# Altium PCB STM32.PcbDoc
Units mm, origin at the board's own origin, x right, y up, seen from the top; angles counter-clockwise.
Board outline 39 x 31 mm, 4 copper layers (Top Layer, Int1 (GND), Int2 (GND), Int 3 (SGNL)), stack 1.57 mm thick; 35 components, 29 nets, 174 pads, 58 vias.
Unrouted connection lines stored in the file: 4.
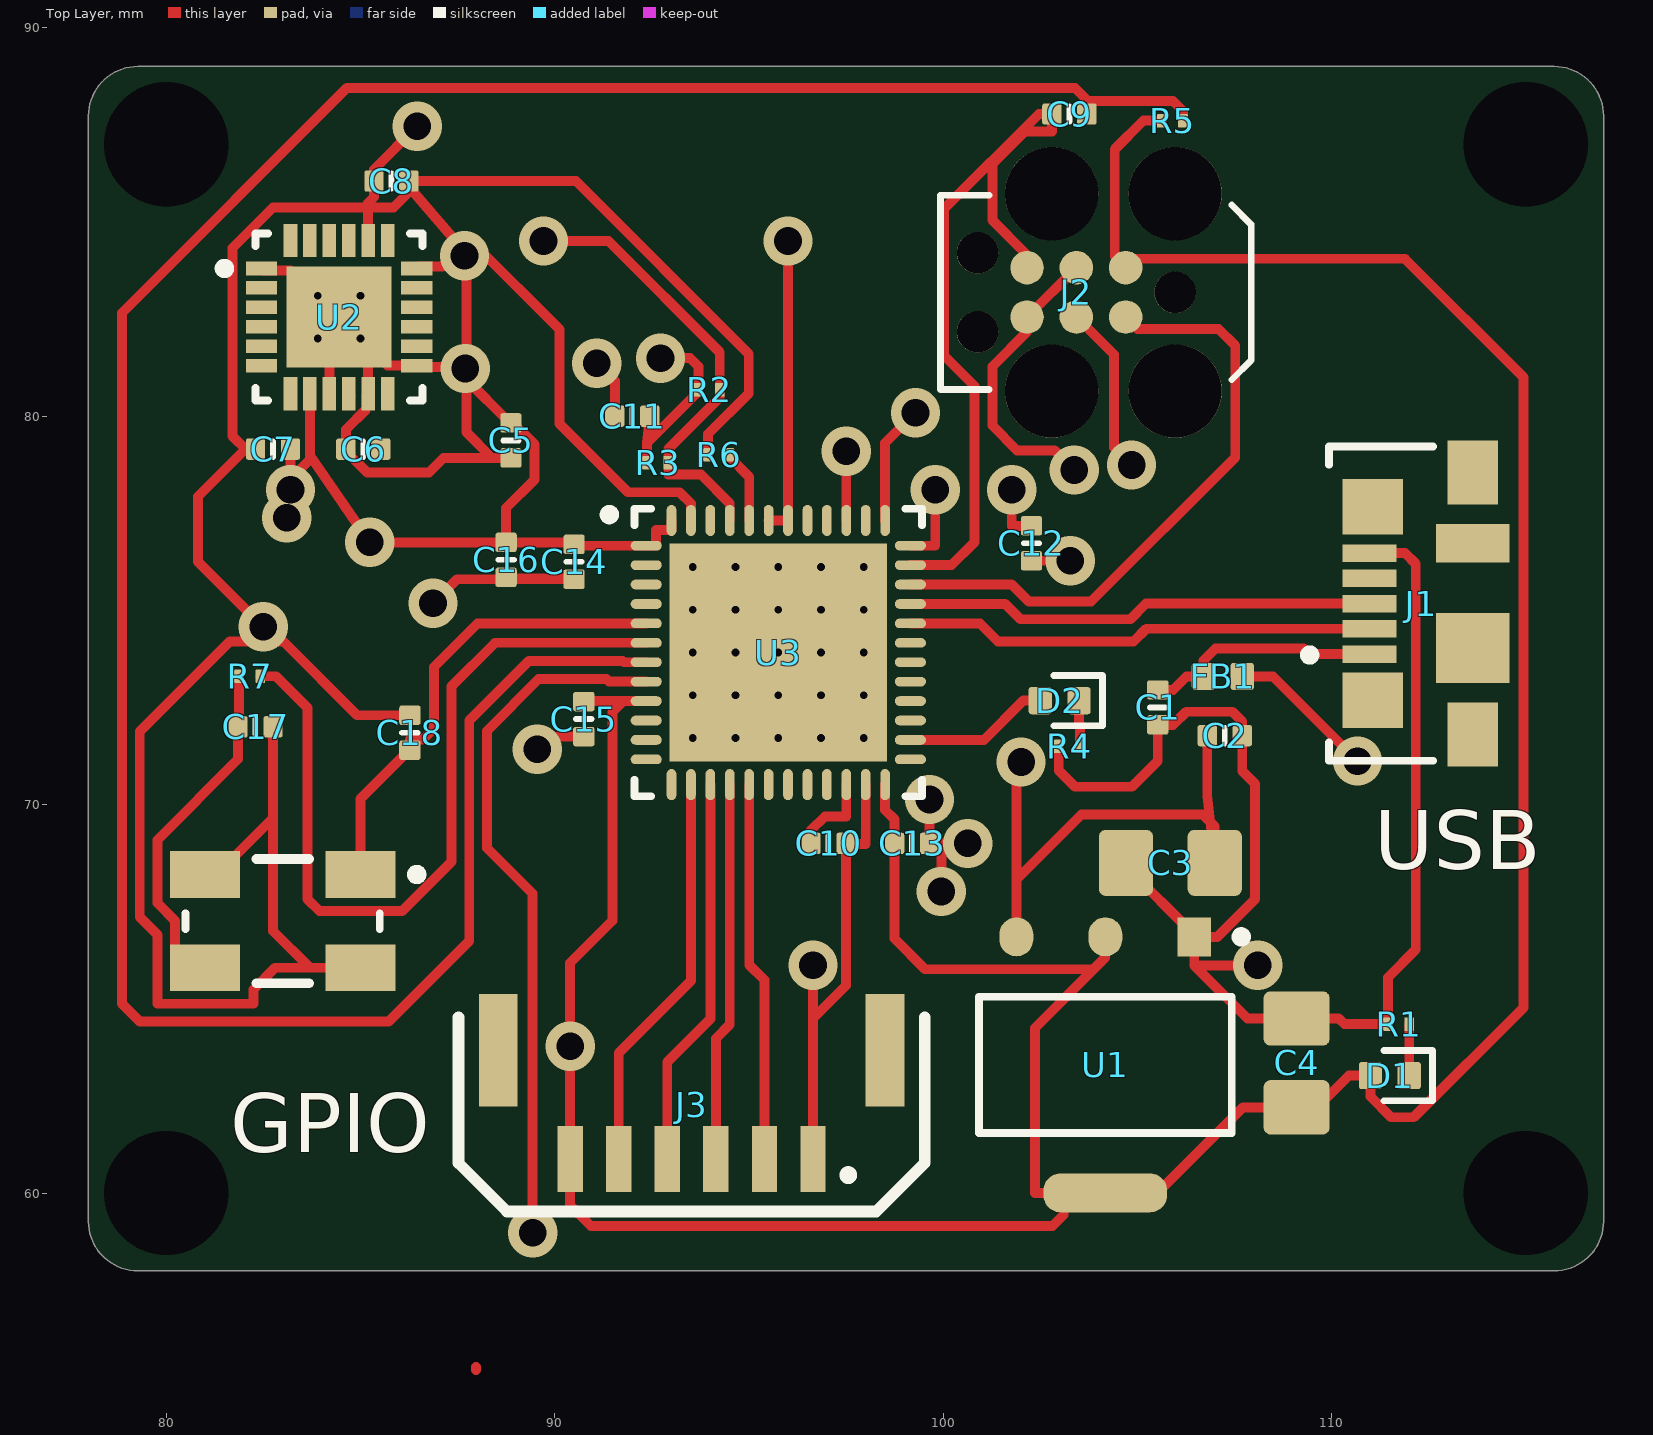
[diagram p0: Top Layer view]
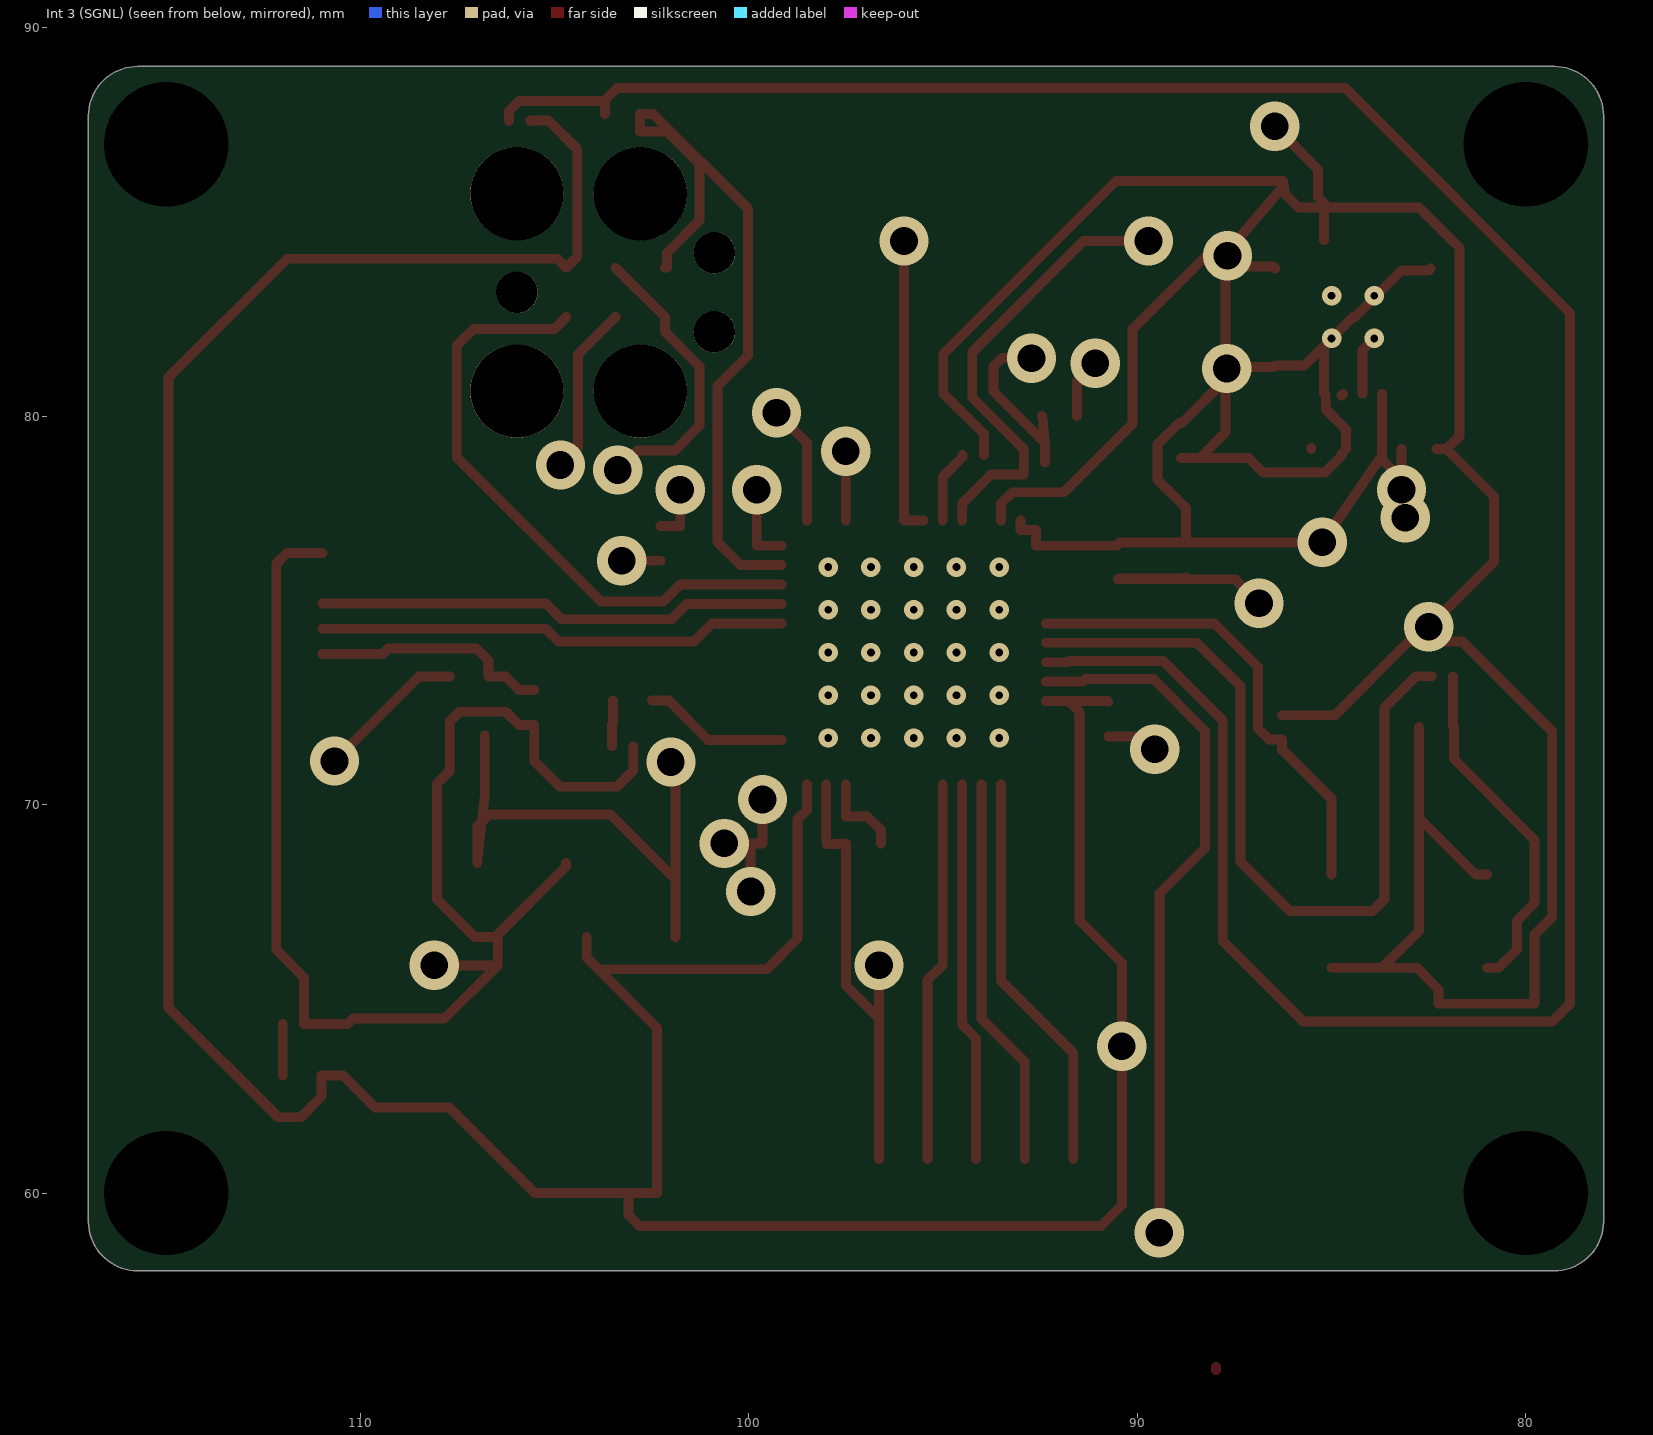
[diagram p1: Int 3 (SGNL) view, seen from below]
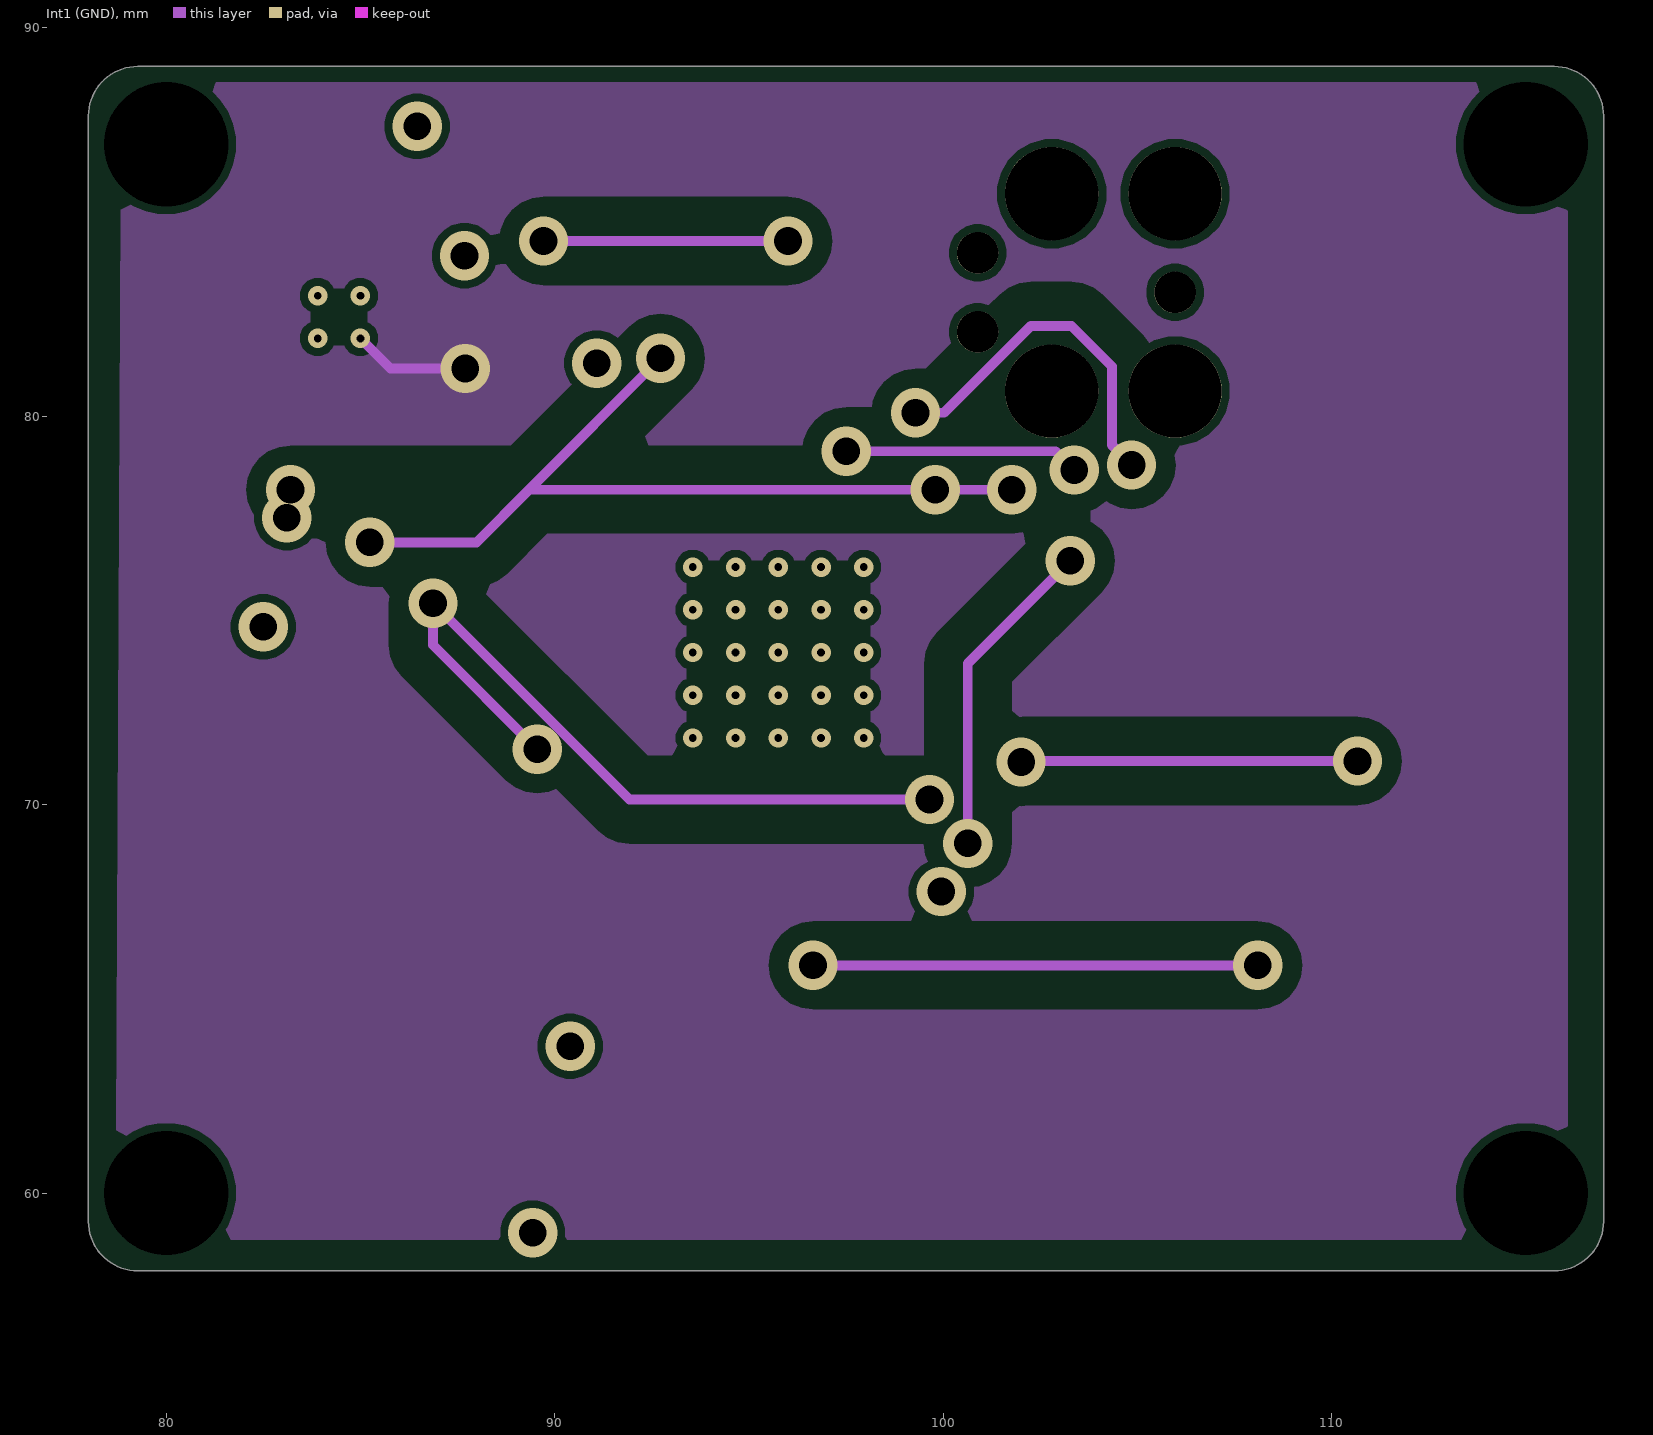
[diagram p2: Int1 (GND)]
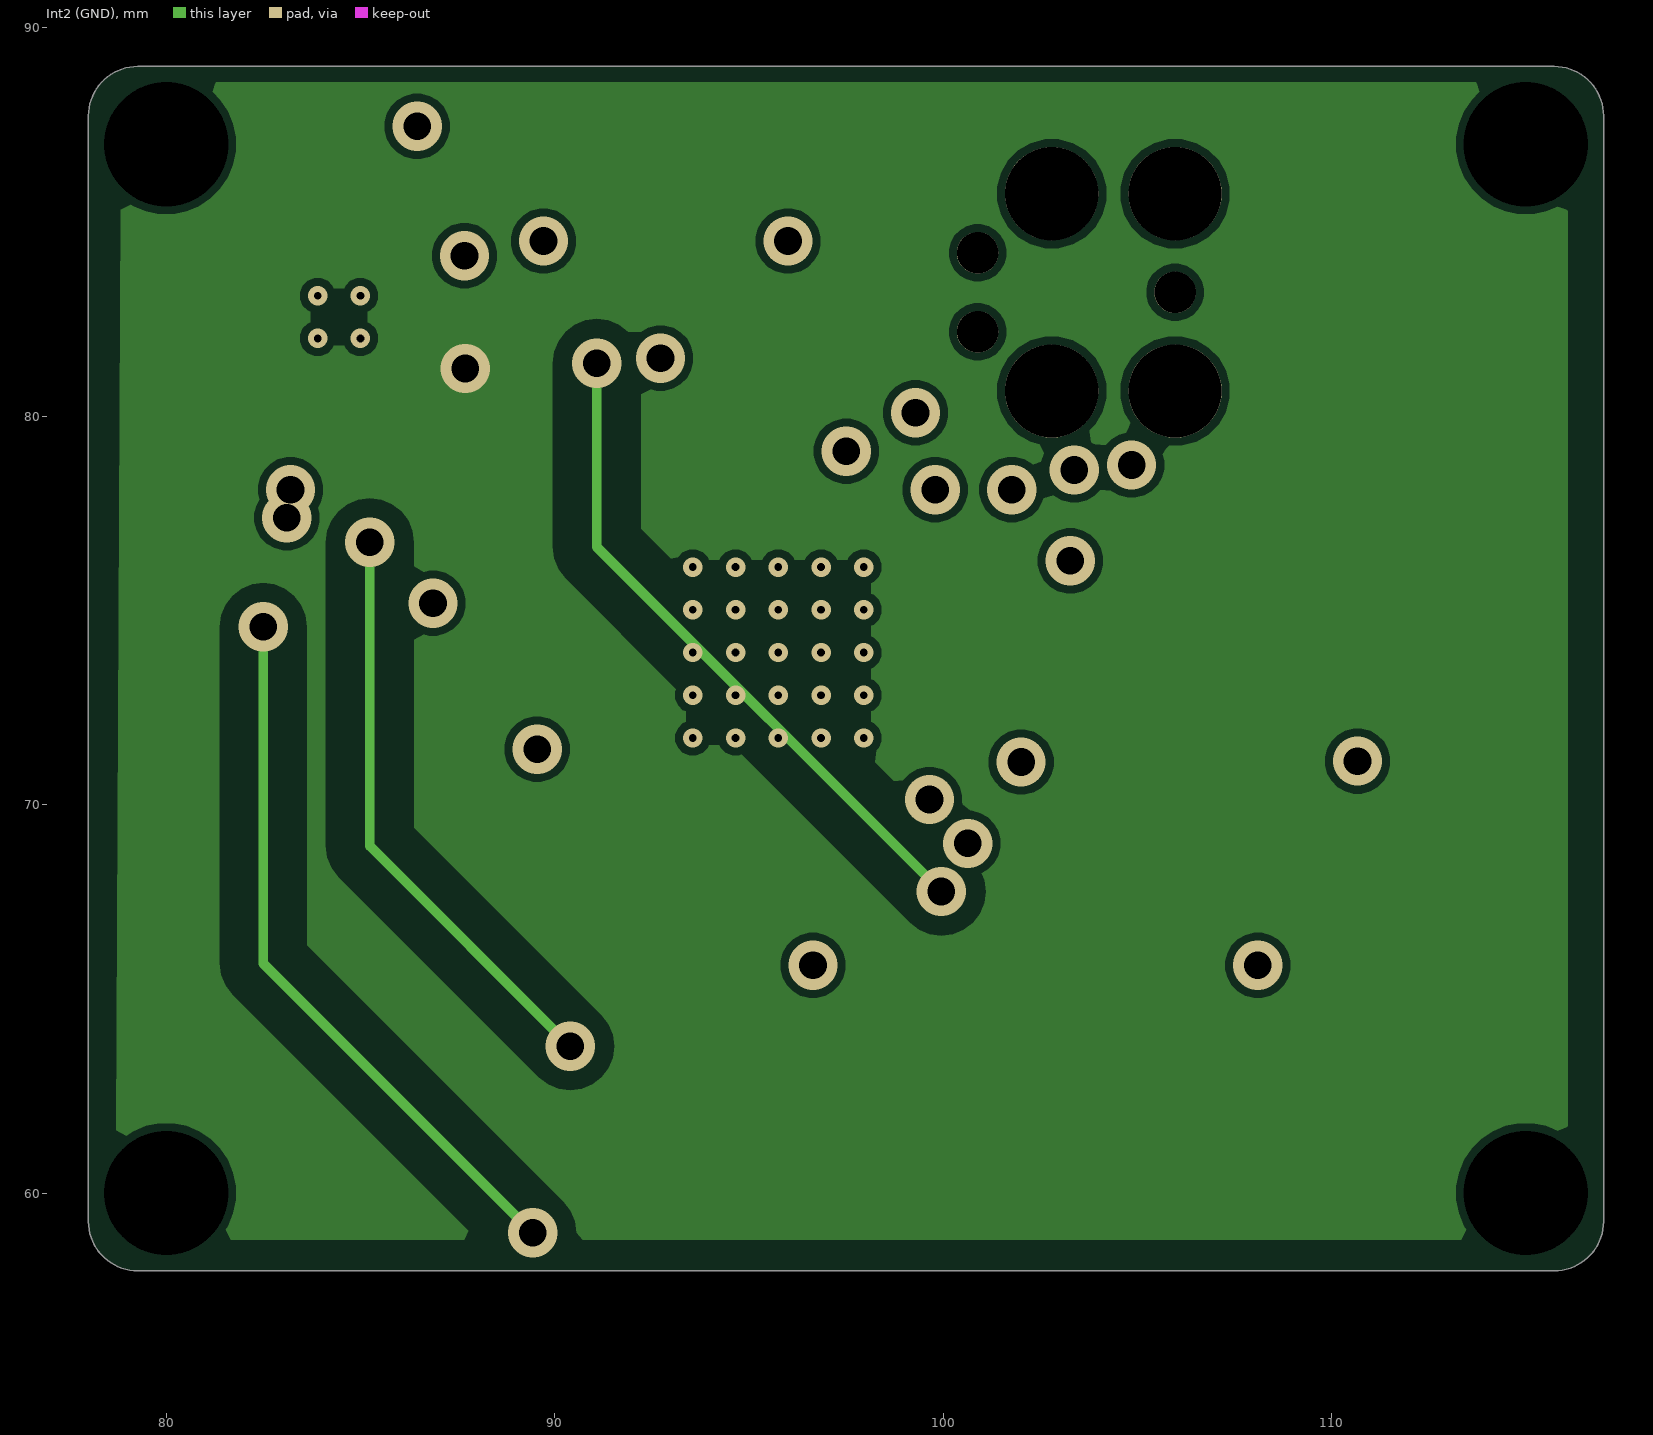
[diagram p3: Int2 (GND)]
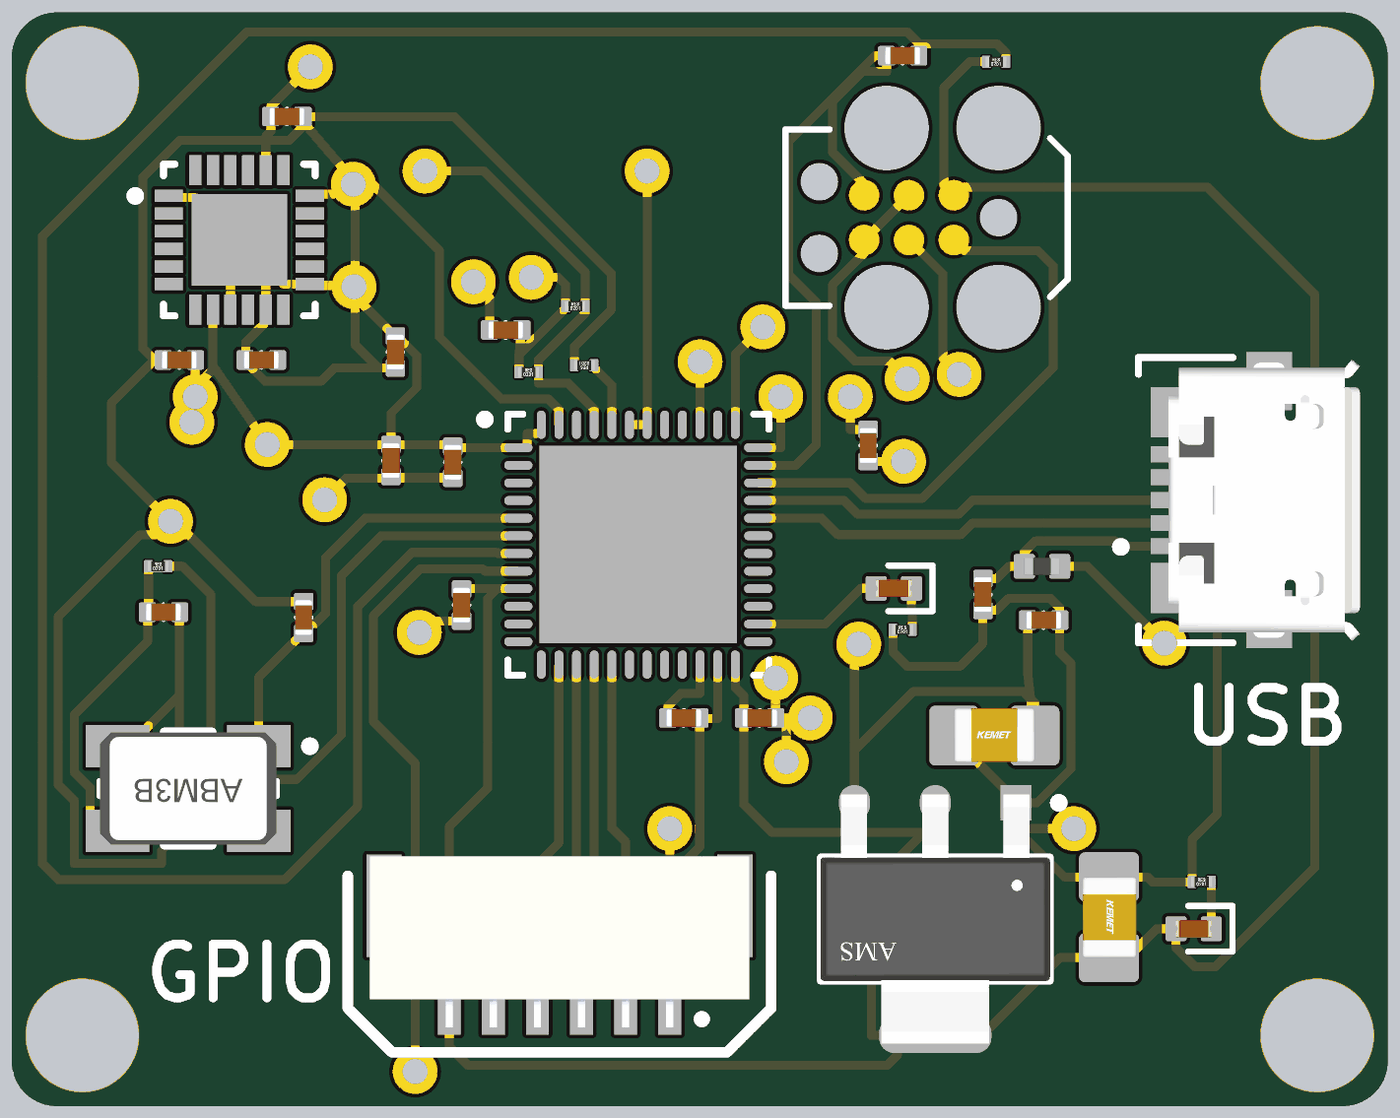
[diagram p4: 3D render of the assembled board from above, using the file's embedded part models]

## Layer stack, top to bottom
Top Solder: solder mask 0.0254, SM-001, Dk 4
Top Layer: signal copper 0.035
Dielectric 1: prepreg 0.2, PP-017, Dk 4.6
Int1 (GND): signal copper 0.0175
Dielectric 3: core 1.065, Core-039, Dk 4.6
Int2 (GND): signal copper 0.0175
Dielectric 5: prepreg 0.2, PP-017, Dk 4.6
Int 3 (SGNL): signal copper 0.035
Bottom Solder: solder mask 0.0254, SM-001, Dk 4

## Board outline
78,59.27 78,87.73 cw(c79.27,87.73) 79.27,89 115.73,89 cw(c115.73,87.73) 117,87.73 117,59.27 cw(c115.73,59.27) 115.73,58 79.27,58 cw(c79.27,59.27)

## Design rules (kind name [scope] priority, off if disabled: settings)
AssemblyTestPointUsage [All] p1: isadvanced=TRUE
AssemblyTestpoint [All] p1: isadvanced=TRUE testpointundercomponent=TRUE minsize=1.016 maxsize=2.54 preferedsize=1.524 minholesize=0 maxholesize=1.016 preferedholesize=0.813 testpointgrid=0.025 usegrid=TRUE gridtolerance=0 allowsidetop=TRUE allowsidebottom=TRUE
Clearance Clearance_1 [InNamedPolygon('NONET_L02_P000')] p1: isadvanced=TRUE gap=0.254 ignorepadtopadclearanceinfootprint=FALSE
Clearance Clearance_1 [(ExistsOnLayer('Int1 (GND)') Or ExistsOnLayer('Int2 (GND)')) vs (ExistsOnLayer('Int1 (GND)') Or ExistsOnLayer('Int2 (GND)'))] p2: gap=1 ignorepadtopadclearanceinfootprint=FALSE except(0.2: SMDPad-SMDPad SMDPad-THPad SMDPad-Via SMDPad-Fill SMDPad-Poly SMDPad-Region SMDPad-Hole Via-Via Via-Fill Via-Poly Via-Region Via-Hole Fill-Fill Fill-Poly Fill-Region Fill-Hole Poly-Poly Poly-Region Poly-Hole Region-Region Region-Hole Hole-Hole) sourcerule=37 cellrowname=All cellrowtype=0 cellcolname=All cellcoltype=0 innerlayers=TRUE
Clearance Clearance_2 [(ExistsOnLayer('Top Layer') Or ExistsOnLayer('Int 3 (SGNL)')) vs (ExistsOnLayer('Top Layer') Or ExistsOnLayer('Int 3 (SGNL)'))] p3: gap=1 ignorepadtopadclearanceinfootprint=FALSE except(0.2: SMDPad-SMDPad SMDPad-THPad SMDPad-Via SMDPad-Fill SMDPad-Poly SMDPad-Region SMDPad-Hole Via-Via Via-Fill Via-Poly Via-Region Via-Hole Fill-Fill Fill-Poly Fill-Region Fill-Hole Poly-Poly Poly-Region Poly-Hole Region-Region Region-Hole Hole-Hole) sourcerule=37 cellrowname=All cellrowtype=0 cellcolname=All cellcoltype=0 outerlayers=TRUE
Clearance [All] p4: gap=0.2 ignorepadtopadclearanceinfootprint=FALSE ismatrix=TRUE
ComponentClearance [All] p1: isadvanced=TRUE gap=0.254 collisioncheckmode=3 verticalgap=0.254 showdistances=FALSE
FabricationTestPointUsage [All] p1: isadvanced=TRUE valid=0 allowmultiple=FALSE
FabricationTestpoint [All] p1: isadvanced=TRUE side=3 testpointundercomponent=TRUE minsize=1.016 maxsize=2.54 preferedsize=1.524 minholesize=0 maxholesize=1.016 preferedholesize=0.813 testpointgrid=0.025 allowsidetop=TRUE allowsidebottom=TRUE usegrid=TRUE gridtolerance=0
FanoutControl Fanout_BGA [IsBGA] p1: isadvanced=TRUE bgadir=Out bgaviamode=Centered fanoutstyle=Auto fanoutdirection=Alternating viagrid=0.025 // Fanout_BGA (Default Rule)
FanoutControl Fanout_LCC [IsLCC] p2: isadvanced=TRUE bgadir=Out bgaviamode=Centered fanoutstyle=Auto fanoutdirection=Alternating viagrid=0.025 // Fanout_LCC (Default Rule)
FanoutControl Fanout_SOIC [IsSOIC] p3: isadvanced=TRUE bgadir=Out bgaviamode=Centered fanoutstyle=Auto fanoutdirection=Alternating viagrid=0.025 // Fanout_SOIC (Default Rule)
FanoutControl Fanout_Small [(CompPinCount < 5)] p4: isadvanced=TRUE bgadir=Out bgaviamode=Centered fanoutstyle=Auto fanoutdirection=OutThenIn viagrid=0.025 // Fanout_Small (Default Rule)
FanoutControl Fanout_Default [All] p5: isadvanced=TRUE bgadir=Out bgaviamode=Centered fanoutstyle=Auto fanoutdirection=Alternating viagrid=0.025 // Fanout_Default (Default Rule)
Height [All] p1: isadvanced=TRUE minheight=0 maxheight=25.4 prefheight=12.7
HoleSize [All] p1: isadvanced=TRUE absolutevalues=TRUE maxlimit=2.54 minlimit=0.025 maxpercent=80.000 minpercent=20.000
HoleToHoleClearance [All] p1: isadvanced=TRUE gap=0.254 allowstackedmicrovias=TRUE
LayerPairs [All] p1: isadvanced=TRUE enforce=TRUE
MinimumSolderMaskSliver [All] p1: isadvanced=TRUE minsoldermaskwidth=0.254
NetAntennae [All] p1: isadvanced=TRUE netantennaetolerance=0
PasteMaskExpansion [All] p1: isadvanced=TRUE expansion=0
PlaneClearance [All] p1: isadvanced=TRUE clearance=0.508
PlaneConnect [All] p1: isadvanced=TRUE planeconnectstyle=Relief reliefexpansion=0.508 reliefentries=4 reliefconductorwidth=0.254 reliefairgap=0.254
PolygonConnect [All] p1: connectstyle=Relief reliefconductorwidth=0.254 reliefentries=4 polygonreliefangle="90 Angle" airgapwidth=0.254
RoutingCorners [All] p1: isadvanced=TRUE cornerstyle=45-Degree minsetback=2.54 maxsetback=2.54
RoutingPriority [All] p1: isadvanced=TRUE routingpriority=0
RoutingVias [All] p1: holewidth=0.711 width=1.27 viastyle="Through Hole" minholewidth=0.711 minwidth=1.27 maxholewidth=0.711 maxwidth=1.27
ShortCircuit [All] p1: isadvanced=TRUE allowed=FALSE
SilkToSilkClearance [All] p1: isadvanced=TRUE silktosilkclearance=0.254
SilkToSolderMaskClearance [IsPad] p1: isadvanced=TRUE minsilkscreentomaskgap=0.254 clearancetoexposedcopper=TRUE
SolderMaskExpansion [All] p1: isadvanced=TRUE expansion=0.102 istentingtop=FALSE
UnRoutedNet [All] p1: isadvanced=TRUE checkbadconnections=TRUE
UnpouredPolygon [All] p1: isadvanced=TRUE
Width [All] p1: maxlimit=0.254 minlimit=0.254 preferedwidth=0.254
4 further rules are at their usual default settings.

## Classes and differential pairs
component class STM32: C1 C2 C3 C4 C5 C6 C7 C8 C9 C10 C11 C12 C13 C14 C15 C16 C17 C18 D1 D2 FB1 J1 J2 R1 R2 R3 R4 R5 R6 R7 U1 U2 U3

## Components (designator, comment, footprint, x,y, rotation, side; value= is the part's Value field where it differs from the comment)
C1 "Capacitor 100nF +/-20% 50V 0402" CAPC0402(1005)60_L 105.525,72.5 r90 top value=2.2uF
C2 "Capacitor 100nF +/-20% 50V 0402" CAPC0402(1005)60_L 107.25,71.775 r180 top value=2.2uF
C3 "22uF" CAP_0805 105.85,68.5 r0 top
C4 "22uF" CAP_0805 109.1,63.35 r270 top
C5 "Capacitor 100nF +/-20% 50V 0402" CAPC0402(1005)60_L 88.875,79.375 r90 top value=100nF
C6 "Capacitor 100nF +/-20% 50V 0402" CAPC0402(1005)60_L 85.075,79.15 r0 top value=100nF
C7 "Capacitor 100nF +/-20% 50V 0402" CAPC0402(1005)60_L 82.75,79.15 r0 top value=10nF
C8 "Capacitor 100nF +/-20% 50V 0402" CAPC0402(1005)60_L 85.8,86.05 r180 top value=2.2nF
C9 "Capacitor 100nF +/-20% 50V 0402" CAPC0402(1005)60_L 103.25,87.775 r0 top value=100nF
C10 "Capacitor 100nF +/-20% 50V 0402" CAPC0402(1005)60_L 97.05,69 r180 top value=2.2uF
C11 "Capacitor 100nF +/-20% 50V 0402" CAPC0402(1005)60_L 92,80 r0 top value=100nF
C12 "Capacitor 100nF +/-20% 50V 0402" CAPC0402(1005)60_L 102.275,76.725 r90 top value=100nF
C13 "Capacitor 100nF +/-20% 50V 0402" CAPC0402(1005)60_L 99.2,69 r180 top value=100nF
C14 "Capacitor 100nF +/-20% 50V 0402" CAPC0402(1005)60_L 90.5,76.25 r90 top value=100nF
C15 "Capacitor 100nF +/-20% 50V 0402" CAPC0402(1005)60_L 90.75,72.2 r90 top value=100nF
C16 "Capacitor 100nF +/-20% 50V 0402" CAPC0402(1005)60_L 88.75,76.3 r90 top value=2.2uF
C17 "Capacitor 100nF +/-20% 50V 0402" CAPC0402(1005)60_L 82.3,72 r180 top value=10pF
C18 "Capacitor 100nF +/-20% 50V 0402" CAPC0402(1005)60_L 86.275,71.85 r270 top value=10pF
D1 "RED" LED_0402_RED 111.5,63.025 r0 top
D2 "RED" LED_0402_RED 103,72.675 r0 top
FB1 "120R" FB_0402 107.2,73.3 r0 top
J1 "473460001" FP-473460001-MFG 113.285,75.175 r90 top
J2 "TC2030" TC2030-FP 103.43,83.185 r180 top
J3 "SM06B-GHS-TB" SM06B-GHS-TB 93.525,62.275 r180 top
R1 "1K" RES_0201 111.725,64.35 r0 top
R2 "2.2K" RES_0201 93.975,80.675 r0 top
R3 "2.2K" RES_0201 92.65,78.8 r0 top
R4 "1K" RES_0201 103.25,71.5 r0 top
R5 "10K" RES_0201 105.9,87.6 r0 top
R6 "10K" RES_0201 94.225,79 r180 top
R7 "0K" RES_0201 82.15,73.3 r0 top
U1 "AMS1117-3.3" FP-AMS1117-IPC_C 104.175,63.3 r270 top
U2 "MPU-6050" IS-QFN-24_V 84.45,82.55 r0 top
U3 "STM32F411CEU6" STM-UFQFPN48_L 95.758,73.914 r0 top
? "24MHz" ABRA-ABM3B-4_V 83,67 r180 top

## Footprints (in the part's own frame and the unit in brackets; to place one, negate y for a bottom-side part, rotate by r counter-clockwise, add the part's x,y. Pads: shape width x height; smd on the part's side, far side on the other; paste and mask are expansions set on the pad)
ABRA-ABM3B-4_V [mm] "SMD, 4-Leads, Body 5x3.2mm"
  rect 1.8x1.2 smd: 1(-2,-1.2) 2(2,-1.2) 3(2,1.2) 4(-2,1.2)
  silkscreen extent -3.58,-1.6 2.5,1.6, body extent -2.5,-1.59 2.5,1.59, height 1.13
CAP_0805 [mm]
  rrect25% 1.4x1.7 smd: 1(-1.143,0) 2(1.143,0)
  body extent -1.15,-0.76 1.15,0.79, height 1.01
CAPC0402(1005)60_L [mm] "Chip Capacitor, Body 1.0x0.5mm, Height 0.6mm, IPC High Density"
  rrect25% 0.5x0.55 smd: 1(-0.45,0) 2(0.45,0)
  silkscreen extent 0,-0.2 0,0.2, body extent -0.5,-0.25 0.5,0.25, height 0.6
FB_0402 [mm]
  rrect25% 0.6x0.7 smd: 1(-0.5,0) 2(0.5,0)
  body extent -0.5,-0.25 0.5,0.25, height 0.51
FP-473460001-MFG [mm]
  rect 0.45x1.38 smd paste+0 mask+0: 1(-1.3,2.31) 2(-0.65,2.31) 3(0,2.31) 4(0.65,2.31) 5(1.3,2.31)
  rect 1.425x1.55 smd paste+0 mask+0: 6(-2.488,2.225) 7(2.487,2.225)
  rect 1.65x1.3 smd paste+0 mask+0: 8(-3.375,-0.35) 11(3.375,-0.35)
  rect 1.8x1.9 smd paste+0 mask+0: 9(-1.15,-0.35)
  rect 1x1.9 smd paste+0 mask+0: 10(1.55,-0.35)
  silkscreen extent -4.04,0.68 4.05,3.97, body extent -4.3,-2.48 4.3,3.45, height 0.25
FP-AMS1117-IPC_C [mm]
  rect 1.004x0.872 smd paste+0 mask+0: 1(-3.295,2.29)
  rrect100% 1.004x0.872 smd paste+0 mask+0: 2(-3.295,0) 3(-3.295,-2.29)
  rrect87% 1.004x3.182 smd paste+0 mask+0: 4(3.295,0)
  silkscreen extent -3.42,-3.25 1.75,3.63, body extent -3.9,-3.35 3.9,3.35, height 0.25
IS-QFN-24_V [mm] "QFN, 24-Leads, Body 4x4mm, Pitch 0.5mm, Thermal Pad 2.7x2.6mm"
  rect 0.8x0.35 smd: 1(-2,1.25) 2(-2,0.75) 3(-2,0.25) 4(-2,-0.25) 5(-2,-0.75) 6(-2,-1.25) 13(2,-1.25) 14(2,-0.75) 15(2,-0.25) 16(2,0.25) 17(2,0.75) 18(2,1.25)
  rect 0.35x0.85 smd mask+0.102: 7(-1.25,-1.975) 8(-0.75,-1.975) 9(-0.25,-1.975) 10(0.25,-1.975) 11(0.75,-1.975) 12(1.25,-1.975) 19(1.25,1.975) 20(0.75,1.975) 21(0.25,1.975) 22(-0.25,1.975) 23(-0.75,1.975) 24(-1.25,1.975)
  rect 2.7x2.6 smd: 25(0,0)
  silkscreen extent -3.07,-2.15 2.15,2.15, body extent -2,-2 2,2, height 0.95
LED_0402_RED [mm]
  rrect25% 0.6x0.7 smd: A(-0.5,0) K(0.5,0)
  silkscreen extent -0.15,-0.65 1.1,0.65, body extent -0.51,-0.25 0.51,0.25, height 0.45
RES_0201 [mm]
  rrect25% 0.25x0.35 smd mask+0.05: 1(-0.275,0) 2(0.275,0)
  body extent -0.3,-0.15 0.3,0.15, height 0.15
SM06B-GHS-TB [mm]
  rect 0.65x1.7 smd: 1(-3.125,1.4) 2(-1.875,1.4) 3(-0.625,1.4) 4(0.625,1.4) 5(1.875,1.4) 6(3.125,1.4)
  rect 1x2.9 smd: ""(-4.975,-1.4) ""(4.975,-1.4)
  silkscreen extent -6,-2.25 6,2.75, body extent -5.38,-2.8 5.38,2.05, height 4.26
STM-UFQFPN48_L [mm] "QFN, 48-Leads, Body 7.1x7.1mm, Pitch 0.5mm, Thermal Pad 5.6x5.6mm, IPC High Density"
  oval 0.8x0.25 smd: 1(-3.4,2.75) 2(-3.4,2.25) 3(-3.4,1.75) 4(-3.4,1.25) 5(-3.4,0.75) 6(-3.4,0.25) 7(-3.4,-0.25) 8(-3.4,-0.75) 9(-3.4,-1.25) 10(-3.4,-1.75) 11(-3.4,-2.25) 12(-3.4,-2.75) 25(3.4,-2.75) 26(3.4,-2.25) 27(3.4,-1.75) 28(3.4,-1.25) 29(3.4,-0.75) 30(3.4,-0.25) 31(3.4,0.25) 32(3.4,0.75) 33(3.4,1.25) 34(3.4,1.75) 35(3.4,2.25) 36(3.4,2.75)
  oval 0.25x0.8 smd: 13(-2.75,-3.4) 14(-2.25,-3.4) 15(-1.75,-3.4) 16(-1.25,-3.4) 17(-0.75,-3.4) 18(-0.25,-3.4) 19(0.25,-3.4) 20(0.75,-3.4) 21(1.25,-3.4) 22(1.75,-3.4) 23(2.25,-3.4) 24(2.75,-3.4) 37(2.75,3.4) 38(2.25,3.4) 39(1.75,3.4) 40(1.25,3.4) 41(0.75,3.4) 42(0.25,3.4) 43(-0.25,3.4) 44(-0.75,3.4) 45(-1.25,3.4) 46(-1.75,3.4) 47(-2.25,3.4) 48(-2.75,3.4)
  rect 5.6x5.6 smd: 49(0,0)
  silkscreen extent -4.47,-3.7 3.7,3.7, body extent -3.55,-3.55 3.55,3.55, height 0.6
TC2030-FP [mil]
  round 33.98 smd paste-17.01: 1(-50,-25) 2(-50,25) 3(0,-25) 4(0,25) 5(50,-25) 6(50,25)
  round 94.49 hole 94.49 unplated: MH(-100,100) MH(-100,-100) MH(25,100) MH(25,-100)
  round 42.01 hole 42.01 unplated: MH(-100,0) MH(100,-40) MH(100,40)
  silkscreen extent -177,-98 138,98

## Part data
C1 C2 C5 C6 C7 C8 C9 C10 C11 C12 C13 C14 C15 C16 C17 C18: library part CMP-001-00067-3, "Chip Capacitor, 100nF +/-20%, 50V, 0402, Thickness 0.6 mm", Case/Package=0402, Max Operating Temperature=85°C, Min Operating Temperature=-55°C, Tolerance=10%, Voltage Rating=50V, Mounting Technology=SMT, Pins=2
C3 C4: library part CAP_0805, "Capacitor SMD 0805"
D1 D2: library part LED_0402_RED, "LED 0402 RED SMD"
FB1: library part FB_0402, "Ferrite Bead SMD 0402"
J1: library part CMP-2000-05246-2, "CONN RCPT USB2.0 MICRO B SMD R/A", Current Rating=1.8A, Manufacturer=Molex, Package=0, Temperature="-30°C to +85°C", Temperature Range High=+85°C, Temperature Range Low=-30°C, Voltage Rating=30V, Automotive=No, Category=Conn, ComponentLink2Description=Datasheet, ComponentLink2URL=https://www.molex.com/webdocs/datasheets/pdf/en-us/0473460001_IO_CONNECTORS.pdf, Conn Orientation="Right Angle", Contact Material=Gold,Nickel, Device Class L1=Connectors, Device Class L2="USB Connectors", Device Class L3=unset, Digikey Description="CONN RCPT USB2.0 MICRO B SMD R/A", Footprint Url=https://www.molex.com/pdm_docs/sd/473460001_sd.pdf, Height=2.945mm, Is Female=yes, Lead Free=Yes, Manufacturer Part Number=473460001, Number Of Contacts=5, Octopart=https://octopart.com/47346-0001-molex-7164928, Pitch=0.65mm, RoHS=TRUE, Shielding=true, Usb Standard="USB 2.0"
J2: "Tag-Connect No-Solder SWD Debug Connector DO NOT PLACE", Manufacturer=Tag-Connect, Manufacturer Part Number=TC2030
J3: "Header Connector 6 Position 1.25MM Pitch SMD Horizontal JST GH", Manufacturer=JST, Manufacturer Part Number=SM06B-GHS-TB
R1 R2 R3 R4 R5 R6 R7: library part RES_0201, "Resistor SMD 0201"
U1: library part CMP-209535-000001-1, "LDO Voltage Regulators 1A, 3.3V", Dropout Voltage=1.1V, Manufacturer="Advanced Monolithic Systems", Max Junction Temp=+125°C, Max Power Dissipation=1.2W, Max Supply Voltage=15V, Nominal Supply Current=5mA, Output Current=1A, Output Voltage=3.3V, Package=AMS1117, Temperature="-40°C to +125°C", Temperature Range Low=-40°C, Automotive=No, Category=IC, ComponentLink2Description=Datasheet, ComponentLink2URL=http://www.advanced-monolithic.com/pdf/ds1117.pdf, Device Class L1="Integrated Circuits (ICs)", Device Class L2="Power Management ICs", Device Class L3="Voltage Regulators - Linear", Height=1.8mm, Ipc Land Pattern Name=SOT229P700X180-4, Lead Free=Yes, Manufacturer Part Number=AMS1117-3.3, Number Of Outputs=1, Octopart=https://octopart.com/ams1117-3.3-advanced+monolithic+systems-25899300, Output Type=Fixed, RoHS=TRUE, Standoff Height=0.64mm, Temperature Range High=+125°C
U2: library part CMP-1753-00002-2, "3-Axis Gyroscope, Accelerometer and a Digital Motion Processor(TM) (DMP), 2.375 to 3.46 V, -40 to 85 degC, 24-Pin QFN, RoHS, Tape and Reel", Manufacturer=InvenSense, Standard Package=5,000, Category=Sensors,Transducers, Datasheet URL=http://datasheet.octopart.com/MPU-6050-InvenSense-datasheet-14421344.pdf, Datasheet Version="Rev. 3.3, 05/2012", Dynamic Catalog=MPU-6000™Series, Family=Multifunction, Featured Product=MPU-60506-Axis,IntegratedI²CSolution, Manufacturer URL=http://www.invensense.com/, Online Catalog=MPU-6000™Series, Other Names="1428-1007-2 / MPU6050", Output Type=Digital, Sensor Type=MotionTracking, Unit PriceUSD=Digital
U3: library part CMP-0243-00165-1, "ARM Cortex-M4 32-bit MCU+FPU, 512 KB Flash, 128 KB RAM, 36 I/Os, 48-Pin UFQFPN, -40 to 85 degC, Tray", I/Os (High Current)=36, Operating Frequency(F) (Processor speed) (MHz)=100, Package Description=UFQFPN48, Package Reference="48-Pin Ultra Thin Fine Pitch Quad Flat No-Lead, 7 x 7 x 0.6 mm Body, 0.5 mm Pitch, Exposed Pad", Supply Voltage(Vcc) min (V)=1.7, ComponentLink1Description="Manufacturer URL", ComponentLink1URL=http://www.st.com/, ComponentLink2Description=Datasheet, ComponentLink2URL=http://www.st.com/st-web-ui/static/active/en/resource/technical/document/datasheet/DM00115249.pdf, Core="ARM Cortex-M4", DatasheetVersion="Rev. 6", FLASH Size (Prog) (kB)=512, Internal RAM Size (kB)=128, Mounting Technology="Surface Mount", Packing=Tray
?: library part CMP-003-00016-2, "Ceramic SMD Crystal, 12.288 MHz, +/- 20 ppm, 18 pF, -20 to 70 degC, 4-Pin SMD, RoHS, Tape and Reel", Case/Package=CSMD, Frequency=12.288MHz, Frequency Tolerance=20ppm, Load Capacitance=18pF, Manufacturer=Abracon, Max Operating Temperature=70°C, Min Operating Temperature=-20°C, Package Description="4-Pin Surface Mount Device, Body 5 x 3.2 mm", Package Quantity=1000, Package Reference=ABM3B, Resistance=70Ohm, Datasheet URL=http://www.abracon.com/Resonators/abm3b.pdf, Datasheet Version=Aug-15, ESR=70, Manufacturer URL=http://www.abracon.com/, Mounting Technology=SM, Packaging=TapeandReel, Pins=4, RoHS Compliant=True, Tolerance=20ppm

## Free pads (board coordinates)
  round 1 hole 3.2: MH(80,60) MH(80,87) MH(115,60) MH(115,87)

## Via types
v1: diameter 1.27, hole 0.711, Top Layer to Int 3 (SGNL), 29 vias
v2: diameter 0.5, hole 0.2, Top Layer to Int 3 (SGNL), 29 vias

## Nets (pads, with @x,y where several pads share a name; then routed paths per layer and width w, separated by ;. In a path a pad name is that pad's centre, name@x,y a point inside that pad or via, vN(x,y) a via of type N, cw(c..) or ccw(c..) an arc to the next point about the centre after c; other vN are vias at no path point)
+3V3: C4.2 C5.2 C7.2 C11.2 C12.2 C13.2 C14.2 C15.2 C16.2 D1.A J2.1 J3.6 R2.1 R3.1 R5.1 U1.2 U1.4 U2.8 U2.13 U3.1 U3.9 U3.24 U3.36 U3.48 | length 166.1
  Top Layer w0.254: v1(83.106,77.384) 83.2,77.478 v1(83.2,78.105) v1@83.2,78.38 ; C7.2 v1@83.2,78.38 ; U2.8 83.7,78.987 ; 85,82 85.7,81.3 U2.13 86.488,81.263 87.662,81.263 v1(87.7,81.225) 87.7,80.975 88.85,79.825 88.926,79.825 89.477,79.274 89.477,78.363 88.75,77.636 C16.2 ; C15.2 90.762,72.662 90.873,72.662 90.875,72.664 91.765,72.664 ; U3.9 91.765,72.664 ; R3.1 92.375,79.304 ; C11.2 92.375,79.304 ; v1(92.727,81.492) 93.488,81.492 93.7,81.28 R2.1 93.7,80.629 92.375,79.304 ; U3.48 93.008,77.064 92.608,77.064 92.608,76.664 U3.1 90.536,76.664 C14.2 90.45,76.75 C16.2 ; U3.24 98.508,69.863 98.75,69.621 C13.2 98.75,66.548 99.537,65.761 103.87,65.761 ; U3.36 99.797,76.664 v1(99.797,78.105) ; v1(101.767,78.105) 101.767,77.175 C12.2 ; U1.2 104.175,66.065 103.87,65.761 ; R5.1 105.625,87.605 105.156,87.605 104.419,86.868 104.419,84.101 J2.1 104.929,84.049 111.887,84.049 114.935,81.001 114.935,64.77 112.116,61.951 111.533,61.951 111,62.484 D1.A 110.444,63.025 109.626,62.207 C4.2 107.714,62.207 105.512,60.005 U1.4 U1.4@103.099,60.005 ; v1@83.2,78.38 83.7,78.88 83.7,78.987 ; 83.7,78.987 v1(85.242,76.75) C16.2 ; 91.765,72.664 91.491,72.39 91.491,67.011 90.4,65.92 v1(90.4,63.779) J3.6 90.4,59.689 90.932,59.157 102.819,59.157 103.099,59.436 U1.4@103.099,60.005 ; U1.4@103.099,60.005 102.362,60.005 102.362,64.252 103.87,65.761
  Int1 (GND) w0.254: 85,82 85.775,81.225 v1(87.7,81.225) ; v1(85.242,76.75) 87.984,76.75 89.339,78.105 ; v1(92.727,81.492) 89.339,78.105 ; v1(101.767,78.105) v1(99.797,78.105) 89.339,78.105
  Int2 (GND) w0.254: v1(85.242,76.75) 85.242,68.937 v1(90.4,63.779)
+5: C2.2 C3.2 FB1.2 U1.3 | length 27.2
  Top Layer w0.254: U1.3 101.885,68.072 ; v1(102.006,71.095) 101.885,70.973 101.885,68.072 ; C2.2 106.8,70.221 106.875,69.554 ; FB1.2 108.488,73.3 v1(110.668,71.12) ; 101.885,68.072 103.561,69.748 106.68,69.748 106.875,69.554 ; 106.875,69.554 C3.2 106.993,69.435 106.875,69.554
  Int1 (GND) w0.254: v1(102.006,71.095) 102.032,71.12 v1(110.668,71.12)
"CRY IN": ?.3 C17.2 R7.1 | length 9.1
  Top Layer w0.254: ?.3 80.7,65.8 80.227,66.273 80.227,67.011 79.773,67.465 79.773,69.092 81.85,71.169 C17.2 81.875,72.025 R7.1
GND: ?.2 ?.4 C1.1 C2.1 C3.1 C4.1 C5.1 C6.1 C7.1 C8.1 C9.1 C10.1 C17.1 C18.1 J1.5 J2.5 J3.1 R1.1 R4.1 R6.2 U1.1 U2.1 U2.9 U2.11 U2.18 U2.25 U3.8 U3.23 U3.35 U3.47 U3.49 | length 210.6
  Top Layer w0.254: ?.2 81.3,68.2 82.75,69.65 ; C7.1 82.042,79.15 ; U2.1 82.498,83.752 83.198,83.752 84.4,82.55 U2.25 v2(85,82) U2.25@85.2,81.8 ; v1(82.499,74.574) 80.823,76.251 80.823,77.931 82.042,79.15 ; C17.1 82.75,69.65 ; v2(83.9,82) 84.2,81.7 U2.9 ; ?.4 83.7,65.8 ; U2.25@85.623,81.377 U2.25@85.2,81.8 ; C8.1@86.25,85.909 87.732,84.184 87.732,79.585 88.392,78.925 ; C18.1 84.912,72.3 83.019,74.193 81.636,74.193 79.319,71.877 79.319,67.104 79.773,66.65 79.773,64.873 82.245,64.873 82.245,65.241 82.804,65.8 83.7,65.8 ; U2.18 86.498,83.848 v1@87.121,83.848 ; v1@87.954,84.406 90.122,82.237 90.122,79.804 91.885,78.041 93.218,78.041 93.508,77.751 U3.47 ; C5.1 88.392,78.925 ; v1(89.433,58.979) 89.433,67.707 88.255,68.885 88.255,71.898 89.586,73.228 91.338,73.228 91.403,73.164 U3.8 ; R6.2 93.95,79.539 94.996,80.585 94.996,81.601 90.547,86.05 C8.1 86.199,85.716 85.852,85.369 82.753,85.369 81.712,84.328 81.712,79.48 82.042,79.15 ; J3.1 96.65,64.491 ; v1(96.65,65.862) 96.65,64.491 ; C10.1 C10.1@97.5,68.986 ; U3.23 98.008,68.986 C10.1@97.5,68.986 ; U3.35 100.218,76.164 100.805,76.751 100.805,80.776 100.025,81.556 100.025,85.337 102.464,87.775 C9.1 102.8,87.325 102.108,87.325 101.268,86.485 101.268,85.04 102.11,84.198 102.11,83.82 J2.5 ; R4.1 102.975,70.881 103.396,70.46 104.865,70.46 105.525,71.12 C1.1 105.918,72.05 106.258,72.39 107.446,72.39 107.7,72.136 C2.1 107.7,70.862 108.026,70.536 108.026,67.564 107.057,66.595 U1.1 ; C3.1 104.707,68.408 106.465,66.65 U1.1 ; v1(108.102,65.862) 106.465,65.862 ; J1.5 111.891,76.475 112.166,76.2 112.166,66.269 111.45,65.552 R1.1 110.328,64.35 110.185,64.493 C4.1 107.834,64.493 106.465,65.862 ; 82.75,69.65 82.75,66.75 83.7,65.8 ; U2.25@85.2,81.8 U2.11 85.152,80.527 85.152,80.177 84.632,79.657 84.632,79.157 C6.1 84.748,79.027 84.748,78.976 85.176,78.548 86.763,78.548 87.14,78.925 88.392,78.925 ; 96.65,64.491 97.5,65.341 C10.1@97.5,68.986 ; 106.465,65.862 U1.1
  Int1 (GND) w0.254: v1(96.65,65.862) v1(108.102,65.862)
  Int2 (GND) w0.254: v1(82.499,74.574) 82.499,65.913 v1(89.433,58.979)
  other v1: 87.68,84.132
  other v2: 93.558,71.714 94.658,71.714 95.758,71.714 96.858,71.714 97.958,71.714 93.558,72.814 94.658,72.814 95.758,72.814 96.858,72.814 97.958,72.814 93.558,73.914 94.658,73.914 95.758,73.914 96.858,73.914 97.958,73.914 93.558,75.014 94.658,75.014 95.758,75.014 96.858,75.014 97.958,75.014 93.558,76.114 94.658,76.114 95.758,76.114 96.858,76.114 97.958,76.114 83.9,83.1 85,83.1
"IMU CPOUT": C8.2 U2.20 | length 3.5
  Top Layer w0.254: U2.20 85.2,85.487 85.35,85.637 C8.2 85.35,86.349 v1(86.462,87.46)
"IMU INT": U2.12
"IMU REGOUT": C6.2 U2.10 | length 0.1
  Top Layer w0.254: U2.10 U2.10@84.748,80.527 ; C6.2 C6.2@85.525,79.175
"IMU SCL": U2.23
"IMU SDA": U2.24
LED_PWR: D1.K R1.2 | length 1.3
  Top Layer w0.254: D1.K R1.2
"MCU BOOT0": R6.1 U3.44 | length 1.9
  Top Layer w0.254: R6.1 94.5,78.943 95.008,78.435 U3.44
"MCU IN": ?.1 C18.2 U3.5 | length 12.3
  Top Layer w0.254: ?.1 85,70.15 86.25,71.4 C18.2 86.275,71.679 86.614,71.679 86.893,71.959 86.893,73.54 88.017,74.664 U3.5
"MCU INT": R2.2 R3.2 U3.42 U3.43 U3.45 | length 25.7
  Top Layer w0.254: v1(89.713,84.506) 91.389,84.506 94.25,81.645 R2.2 94.25,80.481 92.925,79.156 R3.2 92.925,78.495 93.768,78.495 94.508,77.755 U3.45 ; U3.43 U3.42 v1(96.008,84.506)
  Int1 (GND) w0.254: v1(89.713,84.506) v1(96.008,84.506)
"MCU LED A": D2.A U3.26 | length 3.8
  Top Layer w0.254: U3.26 101.051,71.664 102.062,72.675 D2.A
"MCU LED K": D2.K R4.2 | length 1.2
  Top Layer w0.254: D2.K 103.5,72.085 103.525,72.06 R4.2
"MCU NRST": C9.2 R5.2 U3.7 | length 69.2
  Top Layer w0.254: U3.7 91.781,73.664 91.751,73.694 89.334,73.694 87.801,72.161 87.801,66.491 85.73,64.419 79.319,64.419 78.865,64.873 78.865,82.658 84.65,88.443 103.395,88.443 103.7,88.138 103.7,88.113 ; C9.2 103.7,88.113 ; R5.2 106.175,87.856 105.918,88.113 103.7,88.113
"MCU OUT": R7.2 U3.6 | length 20.8
  Top Layer w0.254: R7.2 82.425,73.304 82.829,73.304 83.642,72.492 83.642,67.564 83.947,67.259 86.077,67.259 87.347,68.529 87.347,73.047 88.464,74.164 U3.6
"MCU SWCLK": J2.4 U3.37 | length 16.7
  Top Layer w0.254: U3.37 98.508,79.306 v1(99.289,80.086) ; J2.4 104.395,81.585 104.395,79.196 v1(104.851,78.74)
  Int1 (GND) w0.254: v1(99.289,80.086) 100.024,80.086 102.256,82.318 103.305,82.318 104.343,81.28 104.343,79.248 v1(104.851,78.74)
"MCU SWDIO": J2.2 U3.34 | length 16.1
  Top Layer w0.254: U3.34 101.768,75.664 102.206,75.226 103.81,75.226 107.518,78.934 107.518,81.813 107.086,82.245 105.005,82.245 J2.2
"MCU SWO": J2.3 J2.6 U3.39 | length 15.4
  Top Layer w0.254: U3.39 v1(97.508,79.096) ; J2.6 102.16,82.17 101.268,81.278 101.268,79.756 101.906,79.118 102.873,79.118 v1(103.378,78.613) ; J2.6 J2.3
  Int1 (GND) w0.254: v1(97.508,79.096) 102.895,79.096 v1(103.378,78.613)
"MCU VCAP1": C10.2 U3.22 | length 2.2
  Top Layer w0.254: C10.2 96.6,69.342 96.956,69.698 97.508,69.698 U3.22
MCU_PA4: J3.5 U3.14 | length 10.4
  Top Layer w0.254: J3.5 91.65,63.608 93.508,65.466 U3.14
MCU_PA5: J3.4 U3.15 | length 10.1
  Top Layer w0.254: J3.4 92.9,63.378 94.008,64.486 U3.15
MCU_PA6: J3.3 U3.16 | length 9.8
  Top Layer w0.254: J3.3 94.15,63.98 94.508,64.338 U3.16
MCU_PA7: J3.2 U3.17 | length 9.8
  Top Layer w0.254: U3.17 95.008,65.873 95.4,65.481 J3.2
NetC11_1: C11.1 C12.1 C13.1 C14.1 C15.1 C16.1 | length 58.3
  Top Layer w0.254: v1(86.868,75.184) 87.484,75.8 88.75,75.8 C14.1 90.475,75.825 88.75,75.825 C16.1 ; v1(89.549,71.425) 89.875,71.75 C15.1 ; v1(91.084,81.365) 91.55,80.899 C11.1 ; v1(99.65,70.129) C13.1 99.955,69 ; v1(99.955,67.761) 99.955,69 ; v1(100.635,69) 99.955,69 ; C12.1 v1(103.276,76.275)
  Int1 (GND) w0.254: v1(89.549,71.425) 86.868,74.106 v1(86.868,75.184) 91.923,70.129 v1(99.65,70.129) ; v1(100.635,69) 100.635,73.633 v1(103.276,76.275)
  Int2 (GND) w0.254: v1(91.084,81.365) 91.084,76.632 v1(99.955,67.761)
USB_D_N: J1.2 U3.32 | length 12.1
  Top Layer w0.254: U3.32 100.952,74.664 101.416,74.199 104.902,74.199 105.228,74.525 J1.2
USB_D_P: J1.3 U3.33 | length 12.1
  Top Layer w0.254: U3.33 101.6,75.164 101.992,74.772 104.821,74.772 105.224,75.175 J1.3
VCC: C1.2 FB1.1 J1.1 | length 6.2
  Top Layer w0.254: C1.2 105.918,72.95 106.268,73.3 FB1.1 106.7,73.705 107.01,74.016 109.283,74.016 109.423,73.875 J1.1
pads on no net: J1.4 J1.6 J1.7 J1.8 J1.9 J1.10 J1.11 J2.MH J3. U2.2 U2.3 U2.4 U2.5 U2.6 U2.7 U2.14 U2.15 U2.16 U2.17 U2.19 U2.21 U2.22 U3.2 U3.3 U3.4 U3.10 U3.11 U3.12 U3.13 U3.18 U3.19 U3.20 U3.21 U3.25 U3.27 U3.28 U3.29 U3.30 U3.31 U3.38 U3.40 U3.41 U3.46
copper on no net: | length 0.1
  Top Layer w0.254: 87.975,55.45 87.975,55.525

## Polygon pours and split planes (outlines as drawn)
no net on Int1 (GND) "NONET_L02_P001" (solid, pour order 1): 78.85,88.375 79.075,88.6 116.075,88.6 116.075,58.95 116.225,58.8 78.7,58.8
no net on Int2 (GND) "NONET_L03_P002" (solid, pour order 2): 78.85,88.375 79.075,88.6 116.075,88.6 116.075,58.95 116.225,58.8 78.7,58.8

## Silkscreen, mask and mechanical layers (free items; w line width, h text height)
Top Overlay:
  text "USB" at 111.104,68.329 h1.52
  text "GPIO" at 81.654,61.054 h1.52
Mechanical 1:
  lines w0.254: 78,59.27 ccw(c79.27,59.27) 79.27,58 115.73,58 ccw(c115.73,59.27) 117,59.27 117,87.73 ccw(c115.73,87.73) 115.73,89 79.27,89 ccw(c79.27,87.73) 78,87.73 78,87 78,60 78,59.27

## Text inside footprints (layer, text, board x,y; h text height)
D1: Top Assembly "+" at 109.617,63.533 h0.5
D2: Top Assembly "+" at 101.117,73.183 h0.5